# EAGLE board SmartCar ESP V1 (EAGLE 9.6.2)
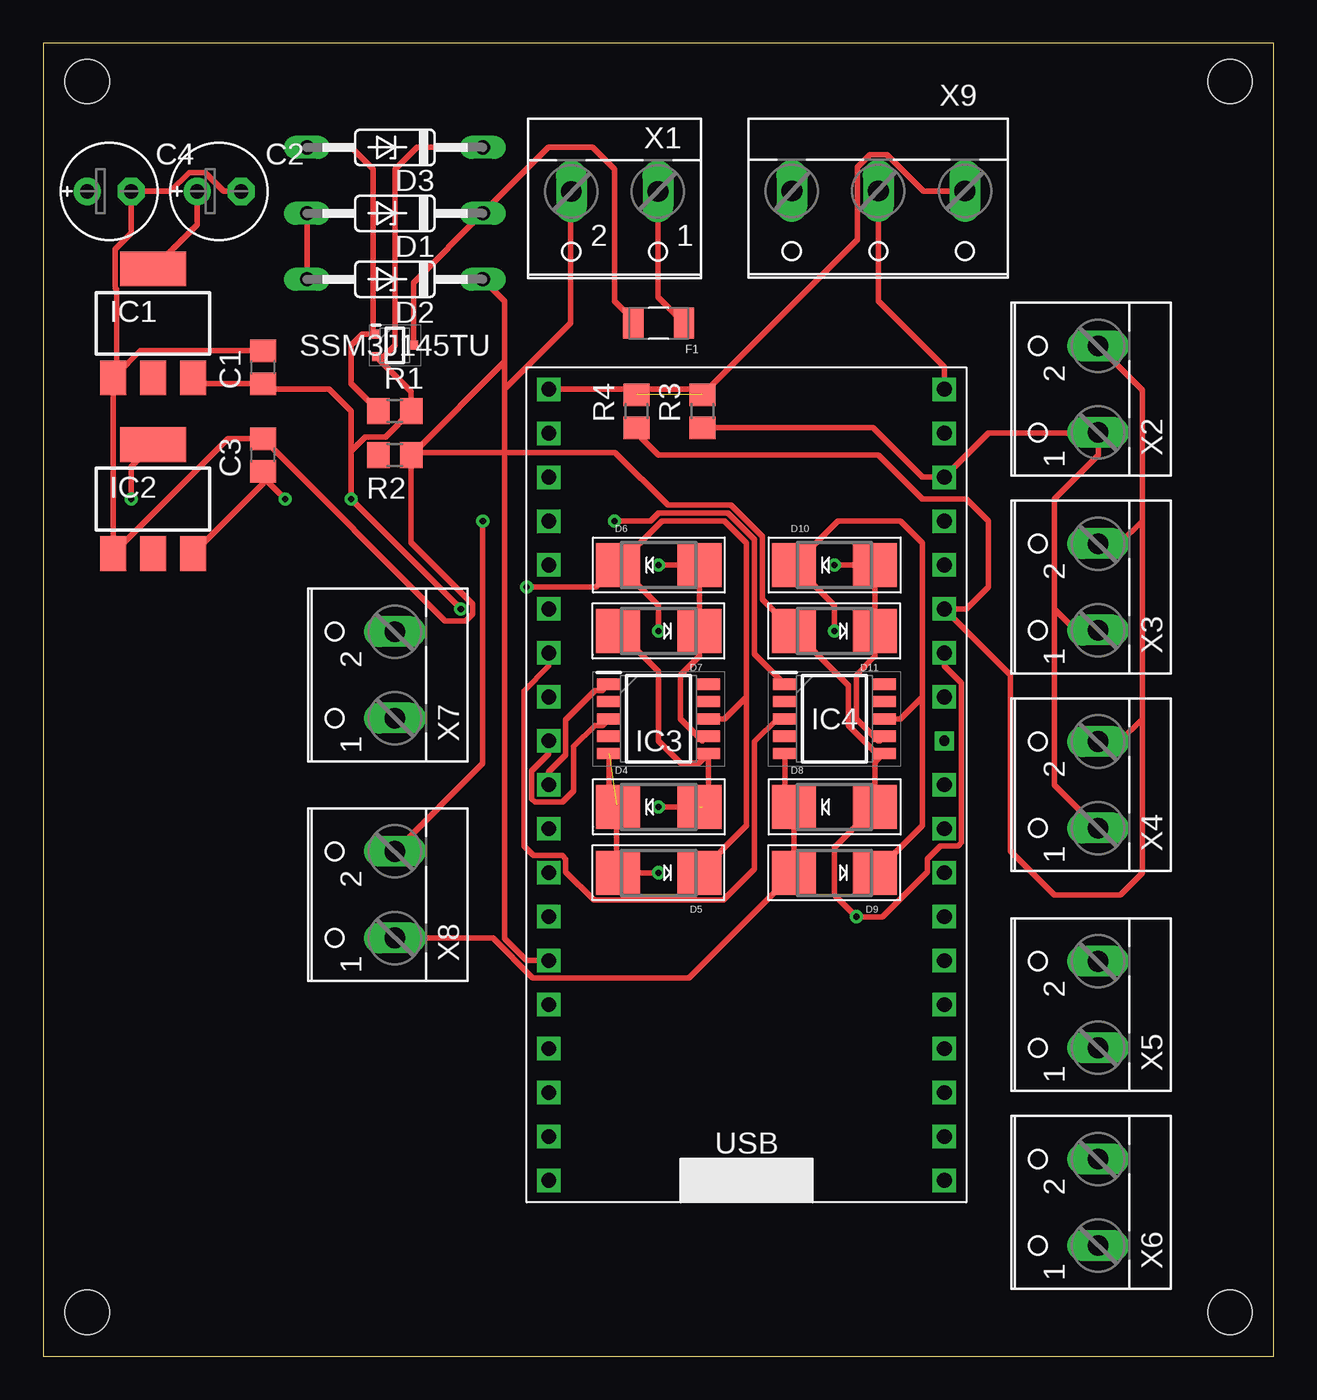
[diagram p0: board, top side]
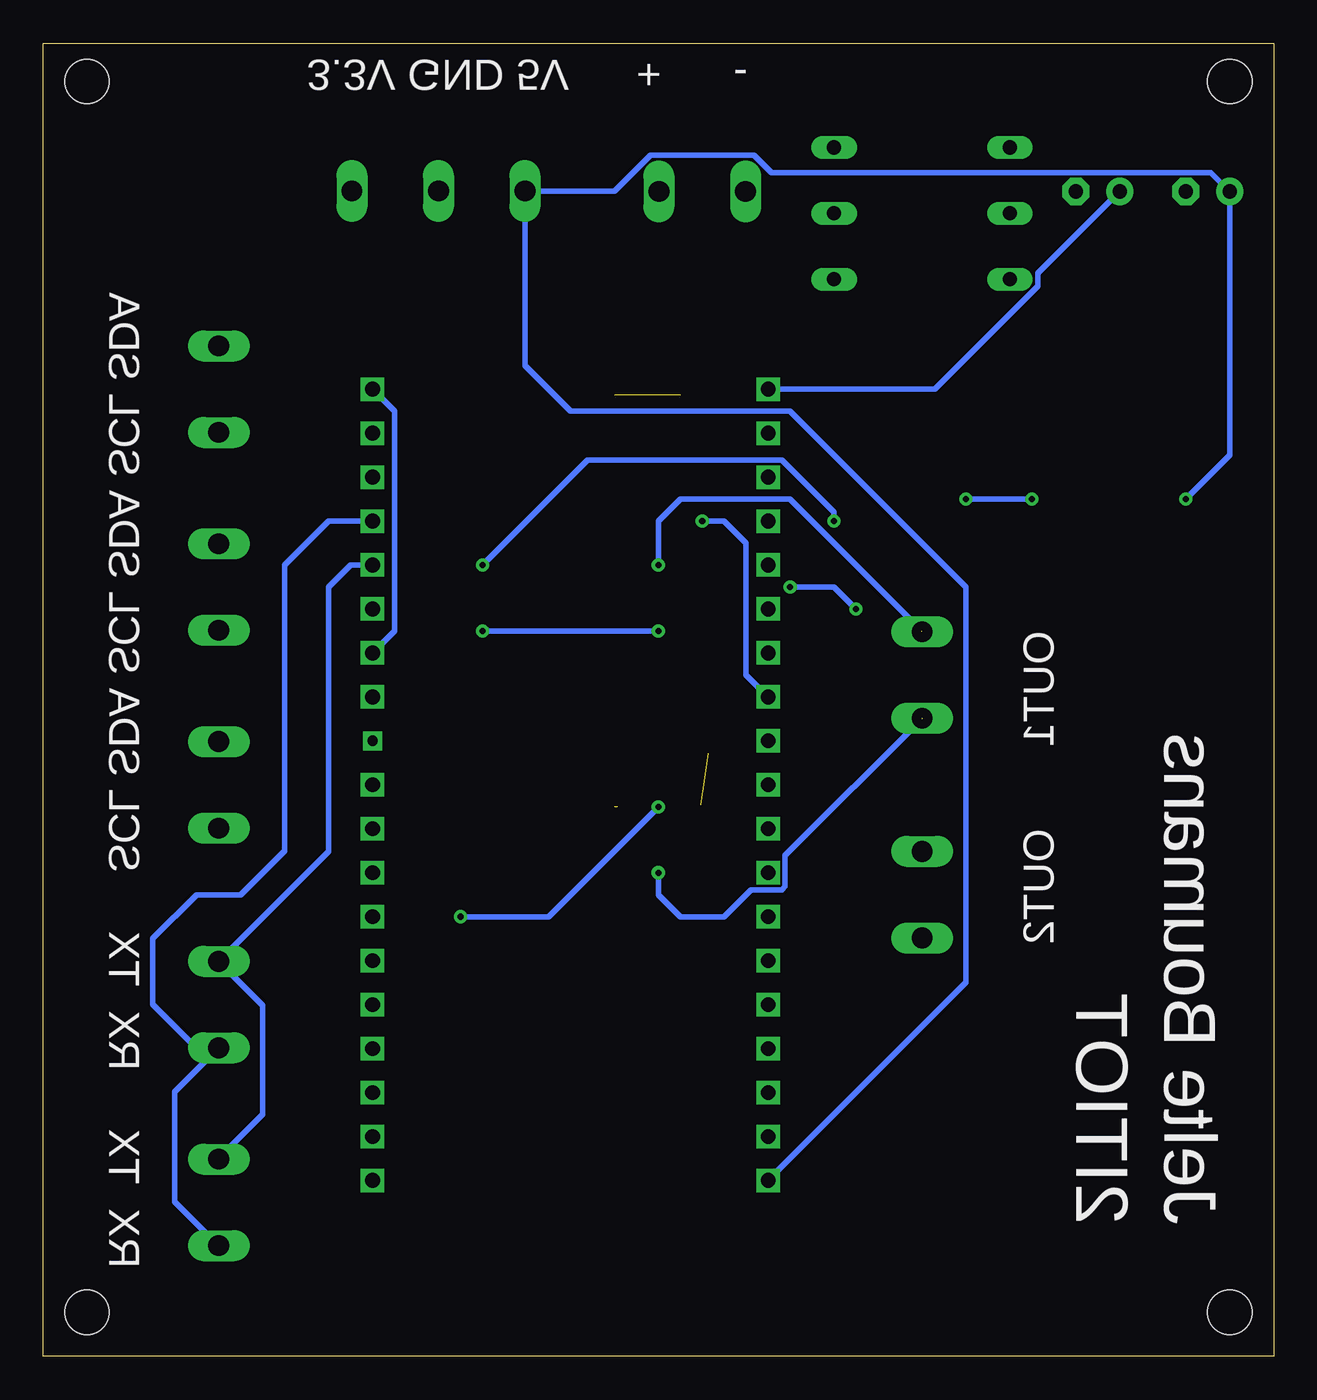
[diagram p1: board, bottom side, seen from below]

Size 71.1 x 75.87 mm. Coordinates in mm from the lower left corner, seen from the top.
Outline: 0,0 71.1,0 71.1,75.87 0,75.87 0,0
Copper layers (1*16): Top 0.035mm / dielectric 0.15mm / Bottom 0.035mm
Design rules "default": minimum track width 6mil, minimum drill 0.35mm, track to track 6mil, track to pad 6mil, pad to pad 6mil, via to via 6mil, smd to smd 6mil, copper to edge 40mil, drill to drill 6mil, minimum pad ring 10mil, minimum via ring 8mil, stop-mask expansion 4mil, vias tented up to drill 0mil, thermal gap 10mil
Holes 2.54 mm at 2.54,73.66 2.54,2.54 68.58,73.66 68.58,2.54

## Footprints (pad centres in the part's own frame; a part is rotated, then mirrored left to right if it is on the bottom)
C0805 = smd 1.3 x 1.5: 1 -0.95,0; 2 0.95,0
E2,5-6E = drill 0.813 pad 1.575: + -1.27,0 | drill 0.813 pad 1.575 octagon: - 1.27,0
DO35Z10 = drill 0.813 long: A 5.08,0; C -5.08,0
SMADIODE = smd 2.54 x 2.54: A 2.349,0; C -2.349,0
FUSC3215X83N = smd 1.17 x 1.8: 1 -1.47,0; 2 1.47,0
SOT223 = smd 1.5 x 2: 1 -2.3,-3.15; 2 0,-3.15; 3 2.3,-3.15 | smd 3.8 x 2: 4 0,3.15
SOP100P620X155-10N = smd 1.35 x 0.65: 1 -2.875,2; 2 -2.875,1; 3 -2.875,0; 4 -2.875,-1; 5 -2.875,-2; 6 2.875,-2; 7 2.875,-1; 8 2.875,0; 9 2.875,1; 10 2.875,2
R0805 = smd 1.3 x 1.5: 1 -0.95,0; 2 0.95,0
ESP32 = drill 0.85 square: 3.3V 1.27,46.99; 5V 1.27,1.27; EN 1.27,44.45; GND1 1.27,13.97; GND2 24.13,46.99; GND3 24.13,31.75; GPIO0 24.13,13.97; GPIO2 24.13,11.43; GPIO4 24.13,16.51; GPIO5 24.13,24.13; GPIO6 24.13,1.27; GPIO7 24.13,3.81; GPIO8 24.13,6.35; GPIO9 1.27,8.89; GPIO10 1.27,6.35; GPIO11 1.27,3.81; GPIO12 1.27,16.51; GPIO13 1.27,11.43; GPIO14 1.27,19.05; GPIO15 24.13,8.89; GPIO16 24.13,19.05; GPIO17 24.13,21.59; GPIO19 24.13,29.21; GPIO21 24.13,34.29; GPIO22 24.13,41.91; GPIO23 24.13,44.45; GPIO25 1.27,26.67; GPIO26 1.27,24.13; GPIO27 1.27,21.59; GPIO32 1.27,31.75; GPIO33 1.27,29.21; GPIO34 1.27,36.83; GPIO35 1.27,34.29; GPIO36 1.27,41.91; GPIO39 1.27,39.37; RX 24.13,36.83; TX 24.13,39.37 | drill 0.6 square: GPIO18 24.13,26.67
SOTFL65P210X75-3N = smd 0.475 x 0.52: 1 -1.088,0.65; 2 -1.088,-0.65; 3 1.088,0
W237-102 = drill 1.194 long: 1 -2.5,-1.27; 2 2.5,-1.27
W237-103 = drill 1.194 long: 1 -5,-1.29; 2 0,-1.29; 3 5,-1.29

## Placement (x,y rotation side)
C1  [C0805]  12.7,57.15 90 top
C2  [E2,5-6E]  10.16,67.31 0 top
C3  [C0805]  12.7,52.07 90 top
C4  [E2,5-6E]  3.81,67.31 0 top
D1  BZX55  [DO35Z10]  20.32,66.04 180 top
D2  BZX55  [DO35Z10]  20.32,62.23 180 top
D3  BZX55  [DO35Z10]  20.32,69.85 180 top
D4  [SMADIODE]  35.56,31.75 0 top
D5  [SMADIODE]  35.56,27.94 180 top
D6  [SMADIODE]  35.56,45.72 0 top
D7  [SMADIODE]  35.56,41.91 180 top
D8  [SMADIODE]  45.72,31.75 0 top
D9  [SMADIODE]  45.72,27.94 180 top
D10  [SMADIODE]  45.72,45.72 0 top
D11  [SMADIODE]  45.72,41.91 180 top
F1  C1F-2  [FUSC3215X83N]  35.56,59.69 180 top
IC1  LD117AS33TR  [SOT223]  6.35,59.69 0 top
IC2  LD117AS50TR  [SOT223]  6.35,49.53 0 top
IC3  LA6583MC-AH  [SOP100P620X155-10N]  35.56,36.83 0 top
IC4  LA6583MC-AH  [SOP100P620X155-10N]  45.72,36.83 0 top
R1  47k  [R0805]  20.32,54.61 0 top
R2  10k  [R0805]  20.32,52.07 180 top
R3  1k  [R0805]  38.1,54.61 90 top
R4  1k  [R0805]  34.29,54.61 90 top
U$1  ESP32  [ESP32]  27.94,8.89 0 top
U$2  SSM3J145TU  [SOTFL65P210X75-3N]  20.32,58.42 0 top
X1  [W237-102]  33.02,66.04 180 top
X2  [W237-102]  59.69,55.88 90 top
X3  [W237-102]  59.69,44.45 90 top
X4  [W237-102]  59.69,33.02 90 top
X5  [W237-102]  59.69,20.32 90 top
X6  [W237-102]  59.69,8.89 90 top
X7  [W237-102]  19.05,39.37 90 top
X8  [W237-102]  19.05,26.67 90 top
X9  [W237-103]  48.26,66.04 180 top

## Library data of the parts
C1-C4 = rcl; SPICEPREFIX: C
D1-D3 = diode
D4-D11 = adafruit
F1 = C1F-2; A_MAX: 0.83; A_MIN: 0.83; A_NOM: 0.83; D_MAX: 3.4; D_MIN: 3.0; D_NOM: 3.2; E_MAX: 1.78; E_MIN: 1.38; E_NOM: 1.58; L1_MAX: 0.76; L1_MIN: 0.26; L1_NOM: 0.51; L_MAX: 0.76; L_MIN: 0.26; L_NOM: 0.51; MANUFACTURER: Bel Fuse Inc.; PARTREV: Jan2019; STANDARD: IPC 7351B
IC1 IC2 = v-reg
IC3 IC4 = LA6583MC-AH; HEIGHT: 1.55mm; MANUFACTURER_NAME: ON Semiconductor; MANUFACTURER_PART_NUMBER: LA6583MC-AH; MOUSER_PART_NUMBER: 863-LA6583MC-AH; MOUSER_PRICE-STOCK: https://www.mouser.com/Search/Refine.aspx?Keyword=863-LA6583MC-AH
R1-R4 = rcl; SPICEPREFIX: R
U$1 = ESP32
U$2 = SSM3J145TU
X1-X8 = con-wago-500; MPN: 237-102; OC_FARNELL: unknown; OC_NEWARK: 70K9898
X9 = con-wago-500; MPN: 237-103; OC_FARNELL: unknown; OC_NEWARK: 18M7116

## Nets
+3V3: C2.+ IC1.4 R3.2 R4.2 U$1.3.3V X9.1
+5V: C4.+ IC2.4 U$1.5V X9.3
+7V: C1.1 C3.1 D3.C D5.C D6.C D9.C D10.C IC1.3 IC2.3 IC3.8 IC4.8 R1.2 U$2.2
GND: C1.2 C2.- C3.2 C4.- D2.C D4.A D7.A D8.A D11.A IC1.1 IC2.1 IC3.6 IC4.6 R2.1 U$1.GND1 U$1.GND2 U$1.GND3 X1.2 X9.2
N$1: F1.1 X1.1
N$2: D1.A D2.A
N$3: D1.C F1.2 U$2.3
N$4: R4.1 U$1.GPIO21 X2.2 X3.2 X4.2
N$5: U$1.TX X5.1 X6.1
N$7: D3.A R1.1 R2.2 U$2.1
N$8: R3.1 U$1.GPIO22 X2.1 X3.1 X4.1
N$9: D4.C D5.A IC3.5 X7.1
N$10: D6.A D7.C IC3.7 X7.2
N$11: D10.A D11.C IC4.7 X8.2
N$12: D8.C D9.A IC4.5 X8.1
N$13: IC3.1 U$1.GPIO26
N$14: IC3.3 U$1.GPIO25
N$15: IC4.1 U$1.GPIO33
N$16: IC4.3 U$1.GPIO32
N$17: U$1.RX X5.2 X6.2

## Tracks (layer width: path | path; a pad name or v marks a point on that pad's centre or on a via)
+3V3  (1 unrouted)
  Top 0.152: 37.78,55.88 R3.2
  Top 0.305: U$1.3.3V 37.78,55.88 | R3.2 47.06,64.52 47.06,68.72 47.76,69.42 48.76,69.42 50.85,67.33 X9.1 | C2.+ 8.89,65.38 IC1.4
  Bottom 0.305: C2.+ 13.61,62.59 13.61,61.83 19.57,55.88 U$1.3.3V
+5V  (via drill 0.35)
  Top 0.305: v5.08,49.53 5.08,51.41 IC2.4
  Bottom 0.305: U$1.5V 17.78,21.59 17.78,44.45 27.94,54.61 40.64,54.61 43.26,57.23 X9.3 38.09,67.33 36.02,69.41 30.02,69.41 29.02,68.4 3.63,68.4 C4.+ 2.54,52.07 v5.08,49.53
+7V  (via drill 0.35)
  Top 0.305: 50.8,38.1 50.8,46.99 49.53,48.26 45.91,48.26 D10.C 45.72,43.37 v45.72,41.91 | 50.8,38.1 49.53,36.83 IC4.8 | D9.C 50.8,30.67 50.8,38.1 | D5.C 40.64,30.67 40.64,38.1 | IC3.8 39.37,36.83 40.64,38.1 | D6.C 35.75,48.26 39.37,48.26 40.64,46.99 40.64,38.1 | D3.C 21.59,69.85 20.32,68.58 20.32,58.42 19.67,57.77 U$2.2 21.27,55.73 R1.2 19.79,53.12 18.59,53.12 17.78,52.31 | 17.78,52.31 v17.78,49.53 v24.13,43.18 | D6.C 31.94,44.45 v27.94,44.45 | D6.C 35.56,43.37 v35.56,41.91 | IC1.3 8.99,56.2 C1.1 13.02,55.88 16.51,55.88 17.78,54.61 17.78,52.31 | C3.1 12.7,50.8 | 12.7,50.8 12.7,50.43 IC2.3 | v13.97,49.53 12.7,50.8
  Bottom 0.305: v24.13,43.18 25.4,44.45 v27.94,44.45 | v45.72,41.91 v35.56,41.91 | v17.78,49.53 v13.97,49.53
GND  (via drill 0.35)  (1 unrouted)
  Top 0.152: 38.83,34.83 IC3.6
  Top 0.305: D11.A 42.84,41.38 | 48.16,34.39 48.07,34.3 D8.A 45.72,29.4 45.72,26.67 v46.99,25.4 48.5,25.4 51.09,27.99 51.09,28.75 51.84,29.5 52.88,29.5 53.05,29.68 53.05,38.91 52.07,39.89 U$1.GND3 | 48.16,34.39 IC4.6 | D11.A 46.53,38.75 46.53,36.46 48.16,34.84 48.16,34.39 | D7.A 35.56,39.56 35.56,35.56 36.83,34.29 37.9,34.29 IC3.6 38.44,32.09 38.1,31.75 | U$1.GND1 27.94,22.86 26.67,24.13 26.67,55.88 | X9.2 48.26,60.96 52.07,57.15 U$1.GND2 | X1.2 30.48,67.27 30.48,59.69 26.67,55.88 | 26.67,55.88 26.67,57.47 | 26.67,57.47 26.67,60.96 D2.C | 21.43,52.23 R2.1 21.27,47.01 24.81,43.46 24.81,42.9 24.41,42.5 23.22,42.5 C3.2 10.69,53.02 IC2.1 IC1.1 4.24,56.73 | 21.43,52.23 26.67,57.47 | 21.43,52.23 33.05,52.23 36.11,49.17 39.75,49.17 41.55,47.37 41.55,43.73 D11.A | D4.A v35.56,31.75 | 4.24,56.73 5.61,58.1 C1.2 12.7,58.42 | 4.24,56.73 4.24,61.62 4.14,61.71 4.14,63.97 5.08,64.9 C4.- 7.34,67.31 8.44,68.4 9.34,68.4 10.44,67.31 C2.-
  Bottom 0.305: U$1.GND2 50.8,54.61 50.8,41.91 U$1.GND3 | v35.56,31.75 41.91,25.4 v46.99,25.4
N$1
  Top 0.305: F1.1 35.52,61.2 X1.1
N$2
  Top 0.305: D1.A D2.A
N$3
  Top 0.305: F1.2 34.29,59.69 33.02,60.96 33.02,68.58 31.75,69.85 29.21,69.85 D1.C 21.41,62.05 U$2.3
N$4
  Top 0.152: 62.19,35.52 X4.2 | 34.29,53.34 R4.1
  Top 0.305: X2.2 63.5,55.84 63.5,48.26 | 63.5,48.26 62.19,46.95 X3.2 | 63.5,48.26 63.5,36.83 | 63.5,36.83 62.19,35.52 | 34.29,53.34 35.56,52.07 48.26,52.07 50.8,49.53 53.34,49.53 54.61,48.26 54.61,44.45 53.34,43.18 U$1.GPIO21 55.88,39.37 55.88,29.21 58.42,26.67 62.23,26.67 63.5,27.94 63.5,36.83
N$5
  Bottom 0.152: 61,17.78 X5.1
  Bottom 0.305: U$1.TX 54.61,48.26 57.15,45.72 57.15,29.21 59.69,26.67 62.23,26.67 64.77,24.13 64.77,20.32 62.23,17.78 61,17.78 | X5.1 63.5,15.28 63.5,8.93 X6.1
N$7
  Top 0.305: R1.1 17.78,56.2 17.78,58.42 18.43,59.07 U$2.1 19.05,59.25 19.05,68.58 17.78,69.85 D3.A
N$8
  Top 0.152: R3.1 38.38,53.38 | X2.1 60.96,53.34 | 60.92,41.91 X3.1 | X4.1 60.92,30.52
  Top 0.305: 58.42,43.18 58.42,49.53 60.96,52.07 60.96,53.34 54.61,53.34 U$1.GPIO22 50.8,50.8 47.94,53.66 R3.1 | 58.42,43.18 59.69,41.91 60.92,41.91 | 60.92,30.52 58.42,33.02 58.42,43.18
N$9  (via drill 0.35)  (2 unrouted)
  Top 0.152: D4.C 33.12,31.84 | 33.12,30.57 32.69,31.01 | D5.A 33.12,28.04
  Top 0.305: 32.69,31.01 IC3.5 | 33.12,28.04 33.12,30.57 | D5.A v35.56,27.94
  Bottom 0.305: v35.56,27.94 35.56,26.67 34.29,25.4 31.75,25.4 30.19,26.96 28.41,26.96 28.23,27.14 28.23,28.92 20.32,36.83
N$10  (via drill 0.35)  (1 unrouted)
  Top 0.152: 38.1,35.56 38.16,35.56 IC3.7
  Top 0.305: 38.1,35.56 36.83,36.83 36.83,39.37 37.91,40.45 D7.C D6.A v35.56,45.72
  Bottom 0.305: v35.56,45.72 35.56,48.26 34.29,49.53 27.94,49.53 20.32,41.91
N$11  (via drill 0.35)
  Top 0.305: 48.07,45.53 D11.C 48.07,40.45 46.99,39.37 46.99,36.83 48.26,35.56 48.33,35.56 IC4.7 | 48.07,45.53 48.26,45.72 D10.A | X8.2 25.4,34.25 v25.4,48.26 | v45.72,45.72 47.88,45.72 48.07,45.53
  Bottom 0.305: v25.4,48.26 25.4,48.78 28.41,51.78 39.66,51.78 v45.72,45.72
N$12
  Top 0.305: IC4.5 42.84,32.28 D8.C D9.A 37.31,21.88 28.28,21.88 25.98,24.17 X8.1
N$13
  Top 0.305: IC3.1 32.31,38.46 31.88,38.46 30.19,36.77 30.19,34.76 29.21,33.77 U$1.GPIO26
N$14
  Top 0.305: IC3.3 32.31,36.46 31.88,36.46 30.65,35.23 30.65,32.67 30.02,32.04 28.41,32.04 28.23,32.22 28.23,33.83 29.21,34.81 U$1.GPIO25
N$15  (via drill 0.35)
  Top 0.305: IC4.1 41.1,40.58 41.1,47.18 39.56,48.72 35.56,48.72 35.1,48.26 v33.02,48.26
  Bottom 0.305: v33.02,48.26 31.75,48.26 30.48,46.99 30.48,39.37 U$1.GPIO33
N$16
  Top 0.305: IC4.3 42.41,36.83 41.1,35.51 41.1,28.16 39.31,26.36 31.81,26.36 30.19,27.99 30.19,28.75 30.02,28.92 28.33,28.92 27.77,29.48 27.77,38.45 29.21,39.89 U$1.GPIO32
N$17
  Bottom 0.152: 60.96,11.43 X6.2
  Bottom 0.305: U$1.RX 53.34,45.72 54.61,44.45 54.61,29.17 X5.2 58.42,20.28 58.42,13.97 60.96,11.43

## Text on the board
bNames: + - | 3.3V GND 5V | SCL SDA | OUT1 | SCL SDA | OUT2 | SCL SDA | RX TX | Jelte Boumans | 2ITIOT | RX TX